# Altium PCB Float_Main_PCB.PcbDoc
Units mm, origin at the board's own origin, x right, y up, seen from the top; angles counter-clockwise.
Board outline 83 x 59 mm, 2 copper layers (Top Layer, Bottom Layer); 48 components, 37 nets, 201 pads, 46 vias.
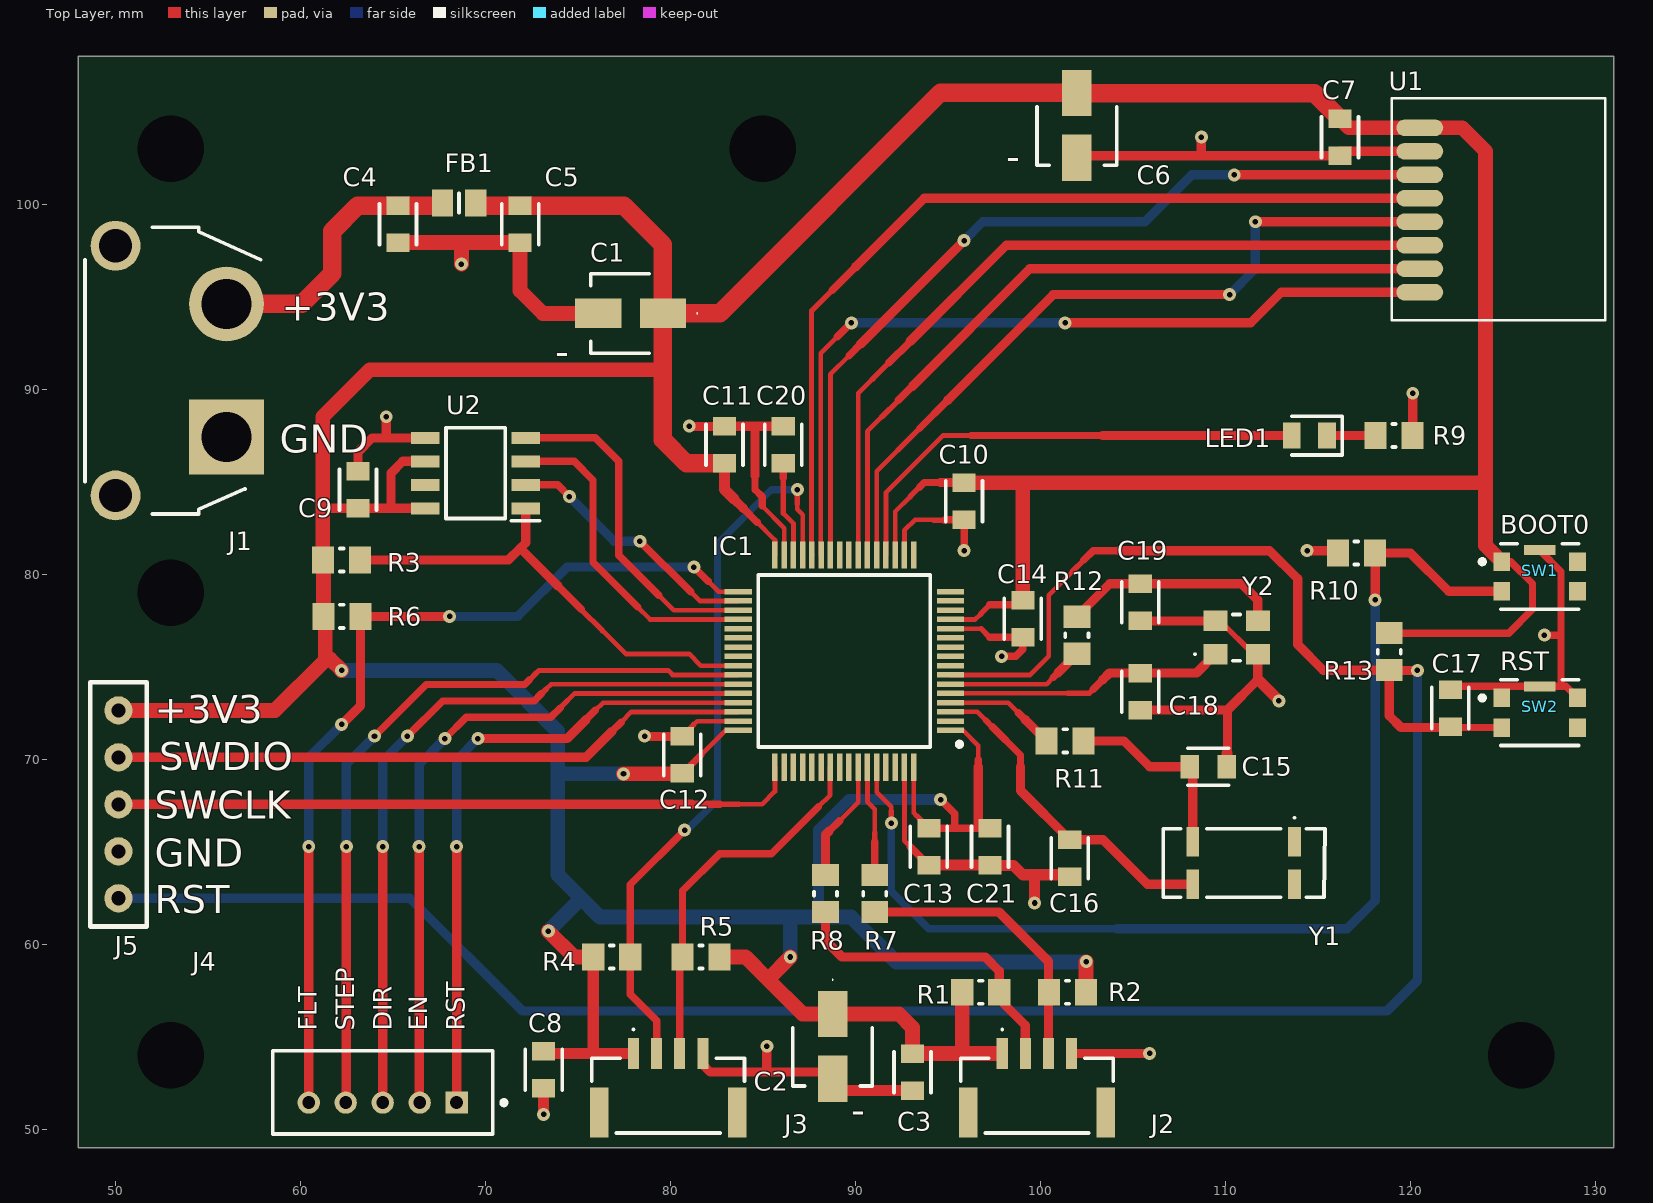
[diagram p0: Top Layer view]
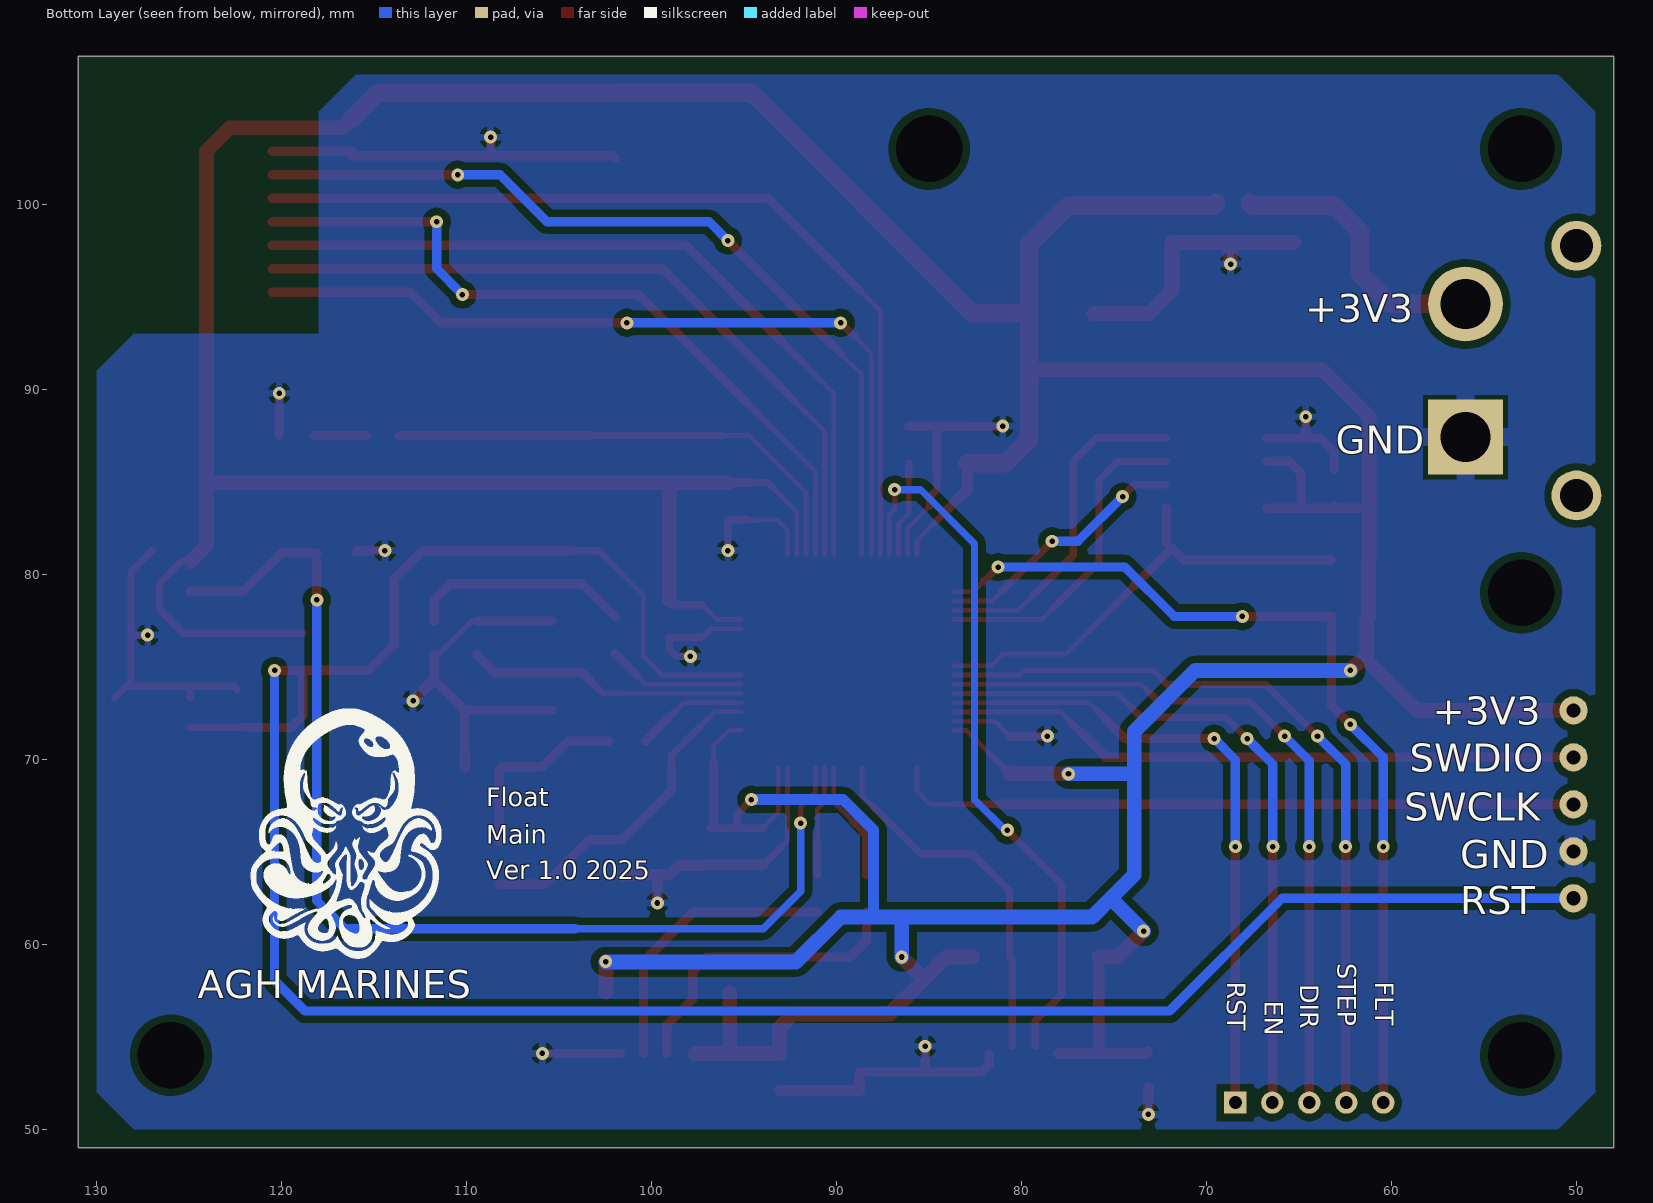
[diagram p1: Bottom Layer view, seen from below]
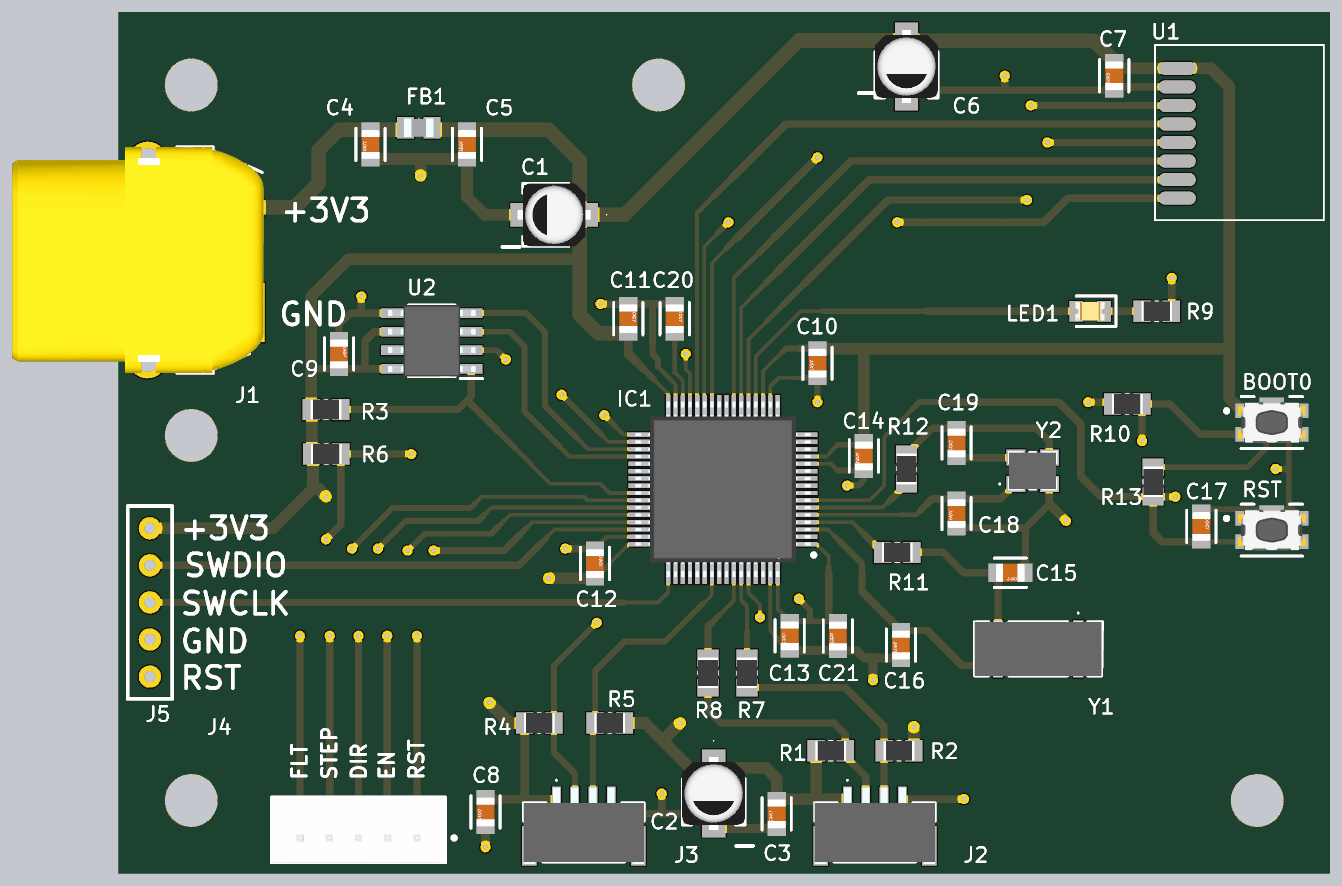
[diagram p2: 3D render of the assembled board from above, using the file's embedded part models]

## Layer stack, top to bottom
Top Solder: solder mask 0.0102, Solder Resist, Dk 3.5
Top Layer: signal copper 0.0356
Dielectric 1: dielectric 0.32, FR-4, Dk 4.8
Bottom Layer: signal copper 0.0356
Bottom Solder: solder mask 0.0102, Solder Resist, Dk 3.5

## Board outline
48,49 48,108 131,108 131,49

## Design rules (kind name [scope] priority, off if disabled: settings)
Clearance Clearance_3 [All] p1: gap=0.4 ignorepadtopadclearanceinfootprint=TRUE except(0.203: Arc-Arc Arc-Track Arc-SMDPad Arc-THPad Arc-Via Arc-Text Arc-Hole Track-Track Track-SMDPad Track-THPad Track-Via Track-Text Track-Hole SMDPad-SMDPad SMDPad-THPad SMDPad-Via SMDPad-Text SMDPad-Hole THPad-THPad THPad-Via THPad-Text THPad-Hole Via-Via Via-Text Via-Hole Text-Text Text-Hole)
DiffPairsRouting [All] p1: maxlimit=0.254 minlimit=0.127 mostfreqgap=0.203 toplayer_minwidth=0.229 toplayer_maxwidth=0.381 toplayer_prefwidth=0.254 bottomlayer_minwidth=0.229 bottomlayer_maxwidth=0.381 bottomlayer_prefwidth=0.254 maxuncoupledlength=12.7
HoleSize [All] p1: absolutevalues=TRUE maxlimit=5 minlimit=0.025 maxpercent=80.000 minpercent=20.000
MinimumSolderMaskSliver [All] p1: minsoldermaskwidth=0.01
PolygonConnect PolygonConnect_6 [All vs IsNamedPolygon('GND_L02_P000')] p1: thpad.connectstyle=Relief thpad.reliefconductorwidth=1 thpad.reliefentries=4 thpad.polygonreliefangle="90 Angle" thpad.airgapwidth=0.254 smdpad.connectstyle=Relief smdpad.reliefconductorwidth=0.3 smdpad.reliefentries=4 smdpad.polygonreliefangle="90 Angle" smdpad.airgapwidth=0.254 via.connectstyle=Relief via.reliefconductorwidth=0.4 via.reliefentries=4 via.polygonreliefangle="90 Angle" via.airgapwidth=0.254
RoutingVias [All] p1: holewidth=0.3 width=0.7 viastyle="Through Hole" minholewidth=0.25 minwidth=0.55 maxholewidth=0.4 maxwidth=0.9
SilkToSilkClearance [All] p1: silktosilkclearance=0.1
SilkToSolderMaskClearance [IsPad] p1: minsilkscreentomaskgap=0.1 clearancetoexposedcopper=TRUE
SolderMaskExpansion [All] p1: expansion=0.102 istentingtop=FALSE
SupplyNets "Schematic Supply Nets_1" [InNet('GND')] p1: voltage=0.000
SupplyNets "Schematic Supply Nets" [InNet('+3V3')] p2: voltage=0.000
UnRoutedNet [All] p1: checkbadconnections=TRUE
Width [All] p1: maxlimit=2 minlimit=0.2 preferedwidth=0.279 minimp=50.000000 maximp=50.000000 favimp=50.000000
24 further rules are at their usual default settings.

## Components (designator, comment, footprint, x,y, rotation, side; value= is the part's Value field where it differs from the comment)
C1 "22uF" EEE1AA220WR 77.851,94.107 r180 top
C2 "22uF" EEE1AA220WR 88.773,54.483 r270 top
C3 "100nF" FP-0805-L_2_01_0_2-W_1_25-MFG 93.091,53.086 r270 top
C4 "2.2uF" FP-0805-L_2_01_0_2-W_1_25-MFG 65.278,98.933 r270 top
C5 "2.2uF" FP-0805-L_2_01_0_2-W_1_25-MFG 71.882,98.933 r270 top
C6 "22uF" EEE1AA220WR 101.981,104.267 r270 top
C7 "100nF" FP-0805-L_2_01_0_2-W_1_25-MFG 116.205,103.632 r270 top
C8 "100nF" FP-0805-L_2_01_0_2-W_1_25-MFG 73.152,53.213 r270 top
C9 "100nF" FP-0805-L_2_01_0_2-W_1_25-MFG 63.119,84.582 r90 top
C10 "100nF" FP-0805-L_2_01_0_2-W_1_25-MFG 95.885,83.947 r270 top
C11 "2.2uF" FP-0805-L_2_01_0_2-W_1_25-MFG 82.931,86.995 r90 top
C12 "100nF" FP-0805-L_2_01_0_2-W_1_25-MFG 80.645,70.231 r90 top
C13 "100nF" FP-0805-L_2_01_0_2-W_1_25-MFG 93.98,65.278 r270 top
C14 "100nF" FP-0805-L_2_01_0_2-W_1_25-MFG 99.06,77.597 r270 top
C15 "15pF" FP-0805-L_2_01_0_2-W_1_25-MFG 109.093,69.596 r0 top
C16 "15pF" FP-0805-L_2_01_0_2-W_1_25-MFG 101.6,64.643 r270 top
C17 "100nF" FP-0805-L_2_01_0_2-W_1_25-MFG 122.174,72.771 r90 top
C18 "8pF" FP-0805-L_2_01_0_2-W_1_25-MFG 105.41,73.66 r270 top
C19 "8pF" FP-0805-L_2_01_0_2-W_1_25-MFG 105.41,78.486 r270 top
C20 "2.2uF" FP-0805-L_2_01_0_2-W_1_25-MFG 86.106,86.995 r90 top
C21 "100nF" FP-0805-L_2_01_0_2-W_1_25-MFG 97.282,65.262 r270 top
FB1 "BLM21PG221SN1D" BEADC2012X105N 68.58,100.076 r0 top
IC1 "STM32F401RET6" QFP50P1200X1200X160-64N 89.408,75.311 r180 top
J1 "XT60PW-F" XT60PWF 56.007,87.415 r90 top
J2 "I2C1 / BAR30" SM04BGHSTBLFSN 99.822,51.943 r0 top
J3 "I2C2" SM04BGHSTBLFSN 79.883,51.943 r0 top
J4 "B5B-PH-K-S(LF)(SN)" FP-B5B-PH-K-S_LF_SN-MFG 64.453,51.985 r180 top
J5 "ST-LINK" goldpin5 50.165,67.564 r270 top
LED1 "GREEN LED" LEDC2012X80N 114.554,87.503 r180 top
R1 "4k7" RESC2013X60X35ML10T20 96.79,57.404 r180 top
R2 "4k7" RESC2013X60X35ML10T20 101.473,57.404 r180 top
R3 "10k" RESC2013X60X35ML10T20 62.23,80.772 r0 top
R4 "4k7" RESC2013X60X35ML10T20 76.835,59.309 r180 top
R5 "4k7" RESC2013X60X35ML10T20 81.661,59.309 r180 top
R6 "10k" RESC2013X60X35ML10T20 62.246,77.724 r0 top
R7 "22R" RESC2013X60X35ML10T20 91.059,62.738 r90 top
R8 "22R" RESC2013X60X35ML10T20 88.392,62.738 r90 top
R9 "270R" RESC2013X60X35ML10T20 119.126,87.503 r180 top
R10 "10k" RESC2013X60X35ML10T20 117.094,81.153 r180 top
R11 "0R" RESC2013X60X35ML10T20 101.346,70.993 r180 top
R12 "0R" RESC2013X60X35ML10T20 101.981,76.708 r90 top
R13 "10k" RESC2013X60X35ML10T20 118.872,75.819 r90 top
SW1 "KMR221GLFS" FP-KMR221GLFS-MFG 127,79.883 r0 top
SW2 "KMR221GLFS" FP-KMR221GLFS-MFG 127,72.517 r0 top
U1 "NRF24L01+ SMD" PCBComponent_1 120.777,104.978 r270 top
U2 "M93C66" SOIC127P600X175-8N 69.469,85.471 r180 top
Y1 "LFXTAL003000REEL" LFXTAL003000REEL 110.998,64.389 r180 top
Y2 "3225-25M-SR" 322525MSR 110.617,76.581 r0 top

## Footprints (in the part's own frame and the unit in brackets; to place one, negate y for a bottom-side part, rotate by r counter-clockwise, add the part's x,y. Pads: shape width x height; smd on the part's side, far side on the other; paste and mask are expansions set on the pad)
322525MSR [mm]
  rect 1.3x1.1 smd: 1(-1.15,-0.9) 2(1.15,-0.9) 3(1.15,0.9) 4(-1.15,0.9)
  silkscreen extent -2.3,-1.25 0.2,1.25, body extent -1.69,-1.34 1.69,1.34, height 0.8
BEADC2012X105N [mm]
  rect 1.15x1.45 smd: 1(-0.9,0) 2(0.9,0)
  silkscreen extent 0,-0.53 0,0.53, body extent -1,-0.63 1,0.63, height 1.05
EEE1AA220WR [mm]
  rect 2.5x1.6 smd: 1(-1.75,0) 2(1.75,0)
  silkscreen extent -3.63,-2.15 2.15,2.15, body extent -2.5,-2.15 2.5,2.15, height 5.78
FP-0805-L_2_01_0_2-W_1_25-MFG [mm]
  rect 1x1.25 smd paste+0 mask+0: 1(-1,0) 2(1,0)
  silkscreen extent -1.1,-1 1.1,1, body extent -1.6,-0.82 1.6,0.82, height 0.25
FP-B5B-PH-K-S_LF_SN-MFG [mm]
  rect 1.2x1.2 hole 0.7 paste-2539.97 mask+0: 1(-4,0.55)
  round 1.2 hole 0.7 paste-2539.97 mask+0: 2(-2,0.55) 3(0,0.55) 4(2,0.55) 5(4,0.55)
  silkscreen extent -6.68,-2.25 5.95,2.25, body extent -6.05,-2.35 6.05,2.35, height 0.25
FP-KMR221GLFS-MFG [mm]
  rect 0.9x1 smd paste+0 mask+0: 1(-2.05,0.8) 2(2.05,0.8) 3(-2.05,-0.8) 4(2.05,-0.8)
  rect 1.7x0.55 smd paste+0 mask+0: 5(0,1.425)
  silkscreen extent -3.22,-1.78 2.1,1.78, body extent -2.6,-1.5 2.6,1.8, height 0.25
goldpin5 [mil]
  round 60 hole 30: 1(-200,0) 2(-100,0) 3(0,0) 4(100,0) 5(200,0)
  silkscreen extent -260,-60 260,60
LEDC2012X80N [mm]
  rect 0.95x1.4 smd: 1(-0.95,0) 2(0.95,0)
  silkscreen extent -1.78,-1.05 0.95,1.05, body extent -1,-0.63 1,0.63, height 0.8
LFXTAL003000REEL [mm]
  rect 0.7x1.6 smd: 1(-2.75,-1.15) 2(2.75,-1.15) 3(2.75,1.15) 4(-2.75,1.15)
  silkscreen extent -4.4,-2.5 4.35,1.85, body extent -4.35,-1.88 4.35,1.88, height 2.6
PCBComponent_1 [mm]
  oval 0.9x2.54 smd: 1(0.838,-0.254) 2(2.108,-0.254) 3(3.378,-0.254) 4(4.648,-0.254) 5(5.918,-0.254) 6(7.188,-0.254) 7(8.458,-0.254) 8(9.728,-0.254)
  silkscreen extent -0.76,-1.78 11.24,9.78
QFP50P1200X1200X160-64N [mm]
  rect 1.475x0.3 smd: 1(-5.738,3.75) 2(-5.738,3.25) 3(-5.738,2.75) 4(-5.738,2.25) 5(-5.738,1.75) 6(-5.738,1.25) 7(-5.738,0.75) 8(-5.738,0.25) 9(-5.738,-0.25) 10(-5.738,-0.75) 11(-5.738,-1.25) 12(-5.738,-1.75) 13(-5.738,-2.25) 14(-5.738,-2.75) 15(-5.738,-3.25) 16(-5.738,-3.75) 33(5.738,-3.75) 34(5.738,-3.25) 35(5.738,-2.75) 36(5.738,-2.25) 37(5.738,-1.75) 38(5.738,-1.25) 39(5.738,-0.75) 40(5.738,-0.25) 41(5.738,0.25) 42(5.738,0.75) 43(5.738,1.25) 44(5.738,1.75) 45(5.738,2.25) 46(5.738,2.75) 47(5.738,3.25) 48(5.738,3.75)
  rect 0.3x1.475 smd: 17(-3.75,-5.738) 18(-3.25,-5.738) 19(-2.75,-5.738) 20(-2.25,-5.738) 21(-1.75,-5.738) 22(-1.25,-5.738) 23(-0.75,-5.738) 24(-0.25,-5.738) 25(0.25,-5.738) 26(0.75,-5.738) 27(1.25,-5.738) 28(1.75,-5.738) 29(2.25,-5.738) 30(2.75,-5.738) 31(3.25,-5.738) 32(3.75,-5.738) 49(3.75,5.738) 50(3.25,5.738) 51(2.75,5.738) 52(2.25,5.738) 53(1.75,5.738) 54(1.25,5.738) 55(0.75,5.738) 56(0.25,5.738) 57(-0.25,5.738) 58(-0.75,5.738) 59(-1.25,5.738) 60(-1.75,5.738) 61(-2.25,5.738) 62(-2.75,5.738) 63(-3.25,5.738) 64(-3.75,5.738)
  silkscreen extent -6.35,-4.65 4.65,4.65, body extent -6,-6 6,6, height 1.6
RESC2013X60X35ML10T20 [mm] "Chip Resistor, 2-Leads, Body 2.1x1.35mm, IPC Low Density"
  rect 1.2x1.45 smd: 1(-1,0) 2(1,0)
  silkscreen extent -0.1,-0.63 0.1,0.63, body extent -1.05,-0.68 1.05,0.67, height 0.6
SM04BGHSTBLFSN [mm]
  rect 0.6x1.7 smd: 1(-1.875,2.15) 2(-0.625,2.15) 3(0.625,2.15) 4(1.875,2.15)
  rect 1x2.7 smd: 5(-3.725,-1.05) 6(3.725,-1.05)
  silkscreen extent -4.13,-2.15 4.13,3.5, body extent -4.13,-2.3 4.13,2.94, height 4.45
SOIC127P600X175-8N [mm]
  rect 1.525x0.65 smd: 1(-2.712,1.905) 2(-2.712,0.635) 3(-2.712,-0.635) 4(-2.712,-1.905) 5(2.712,-1.905) 6(2.712,-0.635) 7(2.712,0.635) 8(2.712,1.905)
  silkscreen extent -3.47,-2.45 1.6,2.58, body extent -3,-2.45 3,2.45, height 1.75
XT60PWF [mm]
  rect 4.05x4.05 hole 2.7: 1(0,0)
  round 4.05 hole 2.7: 2(7.2,0)
  round 2.7 hole 1.8: 3(-3.15,6) 4(10.35,6)
  silkscreen extent -4.15,-1.85 11.35,7.65, body extent -4.15,-1.94 11.35,15.26, height 8.37

## Part data
C1 C2 C6: library part EEE1CA100SR, "Capacitor Polarised", Manufacturer_Name=Panasonic, Arrow Part Number=EEE1CA100SR, Arrow Price/Stock=https://www.arrow.com/en/products/eee-1ca100sr/panasonic, Datasheet Link=http://industrial.panasonic.com/cdbs/www-data/pdf/RDE0000/ABA0000C1145.pdf, Height=5.5mm, Manufacturer_Part_Number=EEE1CA100SR
C3 C7 C8 C9 C10 C12 C13 C14 C15 C16 C17 C18 C19 C20 C21: library part CMP-1036-04738-3, Capacitance=100n, Case Code (Imperial)=0805, Case Code (Metric)=2012, Dielectric=X7R, Insulation Resistance=100GR, Max Operating Temperature=125°C, Min Operating Temperature=-55°C, Package Quantity=1, Tolerance=10%, Voltage=10V, Case/Package=0805, Construction=Flat, Contact Plating=Tin, Depth=1.25mm, Dissipation Factor=5%, Height=1.4mm, Lead Free="Lead Free", Length=2.01mm, Mount="Surface Mount", Number of Pins=2, Packaging="Tape and Reel", Radiation Hardening=No, REACH SVHC="No SVHC", RoHS Compliant=Yes, Series=-, Size=1.4mm, Termination=SMD/SMT, Thickness=0.055inch, Voltage Rating=10V, Voltage Rating (DC)=10V, Width=1.25mm
C4 C5 C11: library part CMP-1036-04738-3, Capacitance=2.2u, Case Code (Imperial)=0805, Case Code (Metric)=2012, Dielectric=X7R, Insulation Resistance=100GR, Max Operating Temperature=125°C, Min Operating Temperature=-55°C, Package Quantity=1, Tolerance=10%, Voltage=10V, Case/Package=0805, Construction=Flat, Contact Plating=Tin, Depth=1.25mm, Dissipation Factor=5%, Height=1.4mm, Lead Free="Lead Free", Length=2.01mm, Mount="Surface Mount", Number of Pins=2, Packaging="Tape and Reel", Radiation Hardening=No, REACH SVHC="No SVHC", RoHS Compliant=Yes, Series=-, Size=1.4mm, Termination=SMD/SMT, Thickness=0.055inch, Voltage Rating=10V, Voltage Rating (DC)=10V, Width=1.25mm
FB1: "Ferrite Bead", Manufacturer_Name="Murata Electronics", Mouser Part Number=81-BLM21P221SG, Arrow Part Number=BLM21PG221SN1D, Arrow Price/Stock=https://www.arrow.com/en/products/blm21pg221sn1d/murata-manufacturing?utm_currency=USD&region=europe, Datasheet Link=https://datasheet.datasheetarchive.com/originals/dk/DKDS-31/605570.pdf, Height=1.05mm, Manufacturer_Part_Number=BLM21PG221SN1D, Mouser Price/Stock=https://www.mouser.co.uk/ProductDetail/Murata-Electronics/BLM21PG221SN1D?qs=N%2FLoXOA9PTJ4i6RHFrsqmw%3D%3D
IC1: "Integrated Circuit", Manufacturer_Name=STMicroelectronics, Mouser Part Number=511-STM32F401RET6, Arrow Part Number=STM32F401RET6, Arrow Price/Stock=https://www.arrow.com/en/products/stm32f401ret6/stmicroelectronics?utm_currency=USD&region=nac, Datasheet Link=http://www.st.com/st-web-ui/static/active/en/resource/technical/document/datasheet/DM00102166.pdf, Height=1.6mm, Manufacturer_Part_Number=STM32F401RET6, Mouser Price/Stock=https://www.mouser.co.uk/ProductDetail/STMicroelectronics/STM32F401RET6?qs=s5SkPsIz108eLldhTu8INg%3D%3D
J1: "Connector", Manufacturer_Name=Amass, Datasheet Link=https://www.tme.eu/Document/1191bc2fa3aee3c446e5a895fd8f7983/XT60PW-F.pdf, Height=8.4mm, Manufacturer_Part_Number=XT60PW-F
J2 J3: library part SM04B-GHS-TB__LF__SN_, "Connector", Arrow Part Number="SM04B-GHS-TB (LF)(SN)", Manufacturer_Name="JST (JAPAN SOLDERLESS TERMINALS)", Arrow Price/Stock=https://www.arrow.com/en/products/sm04b-ghs-tb-lf-sn-/jst-manufacturing?utm_currency=USD&region=europe, Datasheet Link=https://www.jst-mfg.com/product/pdf/eng/eGH.pdf?688ae3895614e, Height=4.35mm, Manufacturer_Part_Number="SM04B-GHS-TB (LF)(SN)"
J4: library part CMP-2000-05908-2, "CONN HEADER VERT 5POS 2MM", Color=Natural, Contact Resistance=20mR, Current Rating=2A, Flammability Rating="UL94 V-0", Housing Color=White, Insulation Resistance=1MR, Max Operating Temperature=85°C, Max Voltage Rating (AC)=100V, Min Operating Temperature=-25°C, Connector Type=Header, Contact Finish - Mating=TIN, Contact Material=Brass, Contact Mating Length=0.13inch, Contact Plating=Tin, Contact Shape=Square, Contact Type="Male Pin", Depth=4.5mm, Fastening Type=Detent, Gender=Male, Height=9.4mm, Housing Material=Polyamide, Insulation Color=Natural, Insulation Material=Nylon, Lead Free="Lead Free", Lead Pitch=2mm, Length=11.9mm, Mated Stacking Heights=8mm, Material=Polyamide, Max Current Rating=2A, Mount="Through Hole", Number of Contacts=5, Number of Pins=5, Number of Poles=5, Number of Positions=5, Number of Rows=1, Orientation=Straight, Packaging=Bulk, Pitch=2mm, REACH SVHC="No SVHC", Series=PH, Termination=Solder, Voltage Rating=100V, Voltage Rating (AC)=100V, Width=4.5mm, Working Voltage=100V
J5: library part CMP-008-000005-1, Design Item ID=goldpin_5, Source=goldpin.SchLib
LED1: library part HSMG-C170, "LED", Manufacturer_Name="Avago Technologies", Mouser Part Number=630-HSMG-C170, Datasheet Link=https://datasheet.datasheetarchive.com/originals/distributors/SFDatasheet-4/sf-00083853.pdf, Height=0.8mm, Manufacturer_Part_Number=HSMG-C170, Mouser Price/Stock=https://www.mouser.co.uk/ProductDetail/Broadcom-Avago/HSMG-C170?qs=YDL0qNrpDT4lm8ArMPkMEA%3D%3D
R1 R2 R3 R4 R5 R6 R7 R8 R9 R10 R11 R12 R13: library part CMP-2100-03671-1, Case Code (Imperial)=0805, Case Code (Metric)=2012, Manufacturer=Yageo, Max Operating Temperature=155degC, Max Power Dissipation=125mW, Min Operating Temperature=-55degC, Package Description="2-Pin Surface Mounted Device, Body 2 x 1.25 mm", Package Quantity=1, Resistance=1KOhm, Temperature Coefficient=100ppm/degreesC, Tolerance=1%, Voltage Rating=150V, Case/Package=0805, Composition=ThickFilm, Datasheet URL=http://www.yageo.com/NewPortal/yageodocoutput?fileName=/pdf/R-Chip/PYu-RC_Group_51_RoHS_L_5.pdf, Datasheet Version="Rev. 5, 10/2016", Depth=1.25mm, Height=0.024inch, Lead Free=LeadFree, Length=0.079inch, Manufacturer URL=http://www.yageo.com/, Military Standard=Not, Number of Pins=2, Number of Terminations=2, Package Reference=0805, Packaging=TapeandReel, Power Rating=125mW, REACH SVHC=Unknown, RoHSCompliant=true, Termination=SMD/SMT, Voltage Rating (DC)=150V, Width=0.049inch
SW1 SW2: library part CMP-10040-000018-1, "SWITCH TACTILE SPST-NO 0.05A 32V", Case/Package=SMD/SMT, Contact Current Rating=50mA, Contact Resistance=100mR, Max Operating Temperature=85°C, Max Voltage Rating (DC)=32V, Min Operating Temperature=-40°C, Operating Force=2N, Package Quantity=1, Power Rating=1W, Actuator Length=0.5mm, Actuator Type=Standard, Contact Material=Silver, Contact Plating=Silver, Current Rating=50mA, Depth=4.6mm, Illumination Type=Non-Illuminated, Lead Free="Lead Free", Length=2.8mm, Max Current Rating=50mA, Mechanical Life=200000Cycles, Mount="Surface Mount", Orientation=Straight, Packaging="Tape and Reel", Radiation Hardening=No, REACH SVHC="No SVHC", Switch Function=Off-Mom, Switch Travel=0.25mm, Termination="Gull Wing", Throw Configuration=SPST, Voltage Rating (DC)=32V, Width=2.8mm
U2: library part M93C66-WMN6TP, "Integrated Circuit", Manufacturer_Name=STMicroelectronics, Mouser Part Number=511-M93C66-WMN6TP, Arrow Part Number=M93C66-WMN6TP, Arrow Price/Stock=https://www.arrow.com/en/products/m93c66-wmn6tp/stmicroelectronics, Datasheet Link=http://www.st.com/st-web-ui/static/active/en/resource/technical/document/datasheet/CD00001142.pdf, Height=1.75mm, Manufacturer_Part_Number=M93C66-WMN6TP, Mouser Price/Stock=https://www.mouser.co.uk/ProductDetail/STMicroelectronics/M93C66-WMN6TP?qs=OMlU9E68qqQmdZ2%252BtP%2FZLw%3D%3D
Y1: "Crystal or Oscillator", Manufacturer_Name=IQD, Mouser Part Number=449-LFXTAL003000REEL, Arrow Part Number=LFXTAL003000REEL, Arrow Price/Stock=https://www.arrow.com/en/products/lfxtal003000reel/iqd-frequency-products?region=europe, Datasheet Link=https://www.iqdfrequencyproducts.com/products/pn/LFXTAL003000.pdf, Height=2.5mm, Manufacturer_Part_Number=LFXTAL003000REEL, Mouser Price/Stock=https://www.mouser.co.uk/ProductDetail/IQD/LFXTAL003000Reel?qs=GJ%2F2ZGcr5uOHwN9t8Hha8Q%3D%3D
Y2: "Crystal or Oscillator", Manufacturer_Name=SRPASSIVES, Datasheet Link=https://www.tme.eu/Document/9cb2d0edad968d8543e7bc99995fd180/3235.pdf, Height=0.7mm, Manufacturer_Part_Number=3225-25M-SR

## Free pads (board coordinates)
  round 1.524 hole 3.6: ""(53,54) ""(53,79) ""(53,103) ""(85,103)
  round 1.524 hole 3.6 mask+0: ""(126,54)

## Via types
v1: diameter 0.7, hole 0.3, Top Layer to Bottom Layer, 46 vias

## Nets (pads, with @x,y where several pads share a name; then routed paths per layer and width w, separated by ;. In a path a pad name is that pad's centre, name@x,y a point inside that pad or via, vN(x,y) a via of type N, cw(c..) or ccw(c..) an arc to the next point about the centre after c; other vN are vias at no path point)
+3V3: C1.1 C2.1 C3.1 C5.1 C6.1 C7.1 C8.1 C9.1 C10.1 C11.1 C12.1 C13.1 C14.1 C21.1 FB1.2 IC1.1 IC1.13 IC1.19 IC1.32 IC1.48 IC1.64 J2.1 J3.1 J5.1 R1.2 R2.1 R3.1 R4.2 R5.1 R6.1 R13.2 SW1.1 U1.1 U2.6 U2.8 | length 350.1
  Top Layer w0.254: 84.709,82.804 85.658,81.855 IC1.32 ; IC1.19 92.158,83.395 92.964,84.201 ; IC1.64 93.158,67.1 93.329,66.929 93.345,66.929 ; IC1.1 95.825,71.561 96.647,70.739 96.647,69.977
  Top Layer w0.256: 81.661,70.231 82.991,71.561 IC1.48 ; IC1.13 96.484,77.561 96.774,77.851
  Top Layer w0.3: 92.964,84.201 93.472,84.709 ; 93.345,66.929 93.98,66.294 C13.1 ; 96.774,77.851 97.282,78.359
  Top Layer w0.4: C12.1@80.391,69.485 C12.1 ; C12.1@80.698,69.479 80.904,69.474 81.661,70.231 ; 83.947,83.566 84.709,82.804 ; 93.472,84.709 93.726,84.963 94.615,84.963 ; C13.1 95.377,66.278 ; v1(94.615,67.818) 95.377,67.056 95.377,66.278 ; 96.647,69.596 96.647,69.977 ; C21.1@96.79,66.278 95.377,66.278 ; 97.282,78.359 98.949,78.359 C14.1@99.123,78.533 ; R13.2 125.333,76.819 126.619,78.105 126.619,79.502 125.438,80.683 SW1.1
  Top Layer w0.5: 61.087,83.439 61.214,83.566 62.992,83.566 C9.1@63.119,83.693 ; C9.1@63.119,83.566 64.897,83.566 ; U2.8 64.897,83.566 ; U2.6 65.532,86.106 64.897,85.471 64.897,83.566 ; C8.1 C8.1@73.272,54.093 ; C12.1@80.629,69.215 C12.1 ; 83.439,84.074 83.947,83.566 ; 94.615,84.963 95.869,84.963 C10.1 ; 96.647,69.596 96.647,66.421 C21.1@96.79,66.278
  Top Layer w0.6: C8.1@73.272,54.093 75.835,54.093 ; R4.2 75.835,54.093 ; J3.1 75.835,54.093 ; C11.1 82.931,84.582 83.439,84.074
  Top Layer w0.8: J5.1 58.628,72.644 61.342,75.358 ; R3.1@61.214,80.788 61.214,83.566 61.214,88.519 63.754,91.059 79.601,91.059 ; R3.1@61.246,80.756 R6.1 61.342,77.628 61.342,75.438 61.595,75.438 v1(62.23,74.803) ; v1(73.406,60.706) 74.803,59.309 R4.2 ; v1(77.47,69.215) C12.1@80.629,69.215 ; C12.1@80.153,69.231 C12.1 ; R5.1 84.074,59.309 85.217,58.166 ; v1(86.487,59.309) 85.344,58.166 85.217,58.166 ; R1.2 95.79,54.118 95.758,54.086 ; C10.1 99.06,84.947 ; J2.1@97.663,54.093 97.409,54.093 97.402,54.086 95.758,54.086 ; C14.1 99.06,84.947 ; R2.1 102.473,59.039 v1(102.489,59.055) ; C7.1 116.697,104.14 U1.1 122.809,104.14 124.079,102.87 124.079,84.947 ; SW1.1 124.079,81.554 124.079,84.947 ; 85.217,58.166 87.15,56.233 C2.1 92.357,56.233 93.091,55.499 C3.1 95.758,54.086 ; 99.06,84.947 124.079,84.947
  Top Layer w1: FB1.2 69.623,99.933 C5.1 77.486,99.933 79.601,97.818 C1.1 ; C11.1 80.883,85.995 79.601,87.277 79.601,91.059 C1.1 ; C7.1 114.82,106.017 C6.1 101.953,106.045 94.615,106.045 82.677,94.107 C1.1
  Bottom Layer w0.6: 88.011,61.468 88.011,66.167 89.662,67.818 v1(94.615,67.818)
  Bottom Layer w0.8: v1(62.23,74.803) 70.612,74.803 73.914,71.501 73.914,69.215 ; v1(73.406,60.706) 75.057,62.357 75.057,62.611 ; v1(77.47,69.215) 73.914,69.215 ; v1(86.487,59.309) 86.487,61.468 ; v1(102.489,59.055) 102.473,59.039 92.218,59.039 89.789,61.468 88.011,61.468 86.487,61.468 ; 73.914,69.215 73.914,63.754 75.057,62.611 ; 75.057,62.611 76.2,61.468 86.487,61.468
BOOT0: IC1.60 R10.1 SW1.3 | length 60.7
  Top Layer w0.256: IC1.60 91.158,68.227 91.948,67.437 91.948,67.183
  Top Layer w0.3: v1(91.948,66.548) 91.948,67.183
  Top Layer w0.5: R10.1 120.015,81.153 122.085,79.083 SW1.3 ; v1(118.11,78.613) R10.1@118.11,80.722
  Bottom Layer w0.4: v1(91.948,66.548) 91.948,62.865 93.98,60.833 104.14,60.833
  Bottom Layer w0.5: 104.14,60.833 116.586,60.833 118.11,62.357 v1(118.11,78.613)
Crystal32_OUT: C15.1 R11.1 Y1.2 | length 10.2
  Top Layer w0.5: R11.1 104.521,70.993 105.918,69.596 C15.1 ; Y1.2 C15.1@108.248,69.441
Crystal_OUT: C19.1 R12.2 Y2.3 | length 12
  Top Layer w0.5: R12.2 103.759,79.486 C19.1 110.887,79.486 111.767,78.606 Y2.3
EEPROM_CS: IC1.41 R3.2 U2.1 | length 25.6
  Top Layer w0.256: 76.327,76.962 77.597,75.692 81.026,75.692 81.657,75.061 IC1.41
  Top Layer w0.3: 75.184,78.105 76.327,76.962
  Top Layer w0.4: 73.914,79.375 75.184,78.105
  Top Layer w0.5: R3.2@63.246,80.772 71.247,80.772 71.882,81.407 ; U2.1 72.181,81.706 71.882,81.407 ; 73.914,79.375 71.882,81.407
EEPROM_MISO: IC1.35 U2.4 | length 18.3
  Top Layer w0.256: 79.375,78.867 80.181,78.061 IC1.35
  Top Layer w0.4: U2.4 75.946,87.376 77.216,86.106 77.216,81.026 79.375,78.867
EEPROM_MOSI: IC1.36 U2.3 | length 17.6
  Top Layer w0.256: 78.232,78.232 78.903,77.561 IC1.36
  Top Layer w0.4: U2.3 74.803,86.106 75.819,85.09 75.819,80.645 78.232,78.232
EEPROM_SCK: IC1.34 U2.2 | length 14.1
  Top Layer w0.256: 81.099,79.048 81.586,78.561 IC1.34
  Top Layer w0.4: U2.2 73.914,84.836 v1(74.549,84.201) ; v1(78.359,81.788) 81.099,79.048
  Bottom Layer w0.5: v1(74.549,84.201) 76.962,81.788 v1(78.359,81.788)
GND: C1.2 C2.2 C3.2 C4.2 C5.2 C6.2 C7.2 C8.2 C9.2 C10.2 C11.2 C12.2 C13.2 C14.2 C15.2 C16.2 C17.2 C18.2 C19.2 C20.2 C21.2 IC1.12 IC1.18 IC1.31 IC1.47 IC1.63 J1.1 J2.4 J3.4 J5.4 R9.1 R10.2 SW1.5 SW2.1 SW2.2 SW2.5 U1.2 U2.5 Y2.2 Y2.4 | length 147.5
  Top Layer w0.254: 84.963,83.693 86.158,82.498 IC1.31 ; IC1.18 92.658,82.371 93.234,82.947 94.218,82.947 94.234,82.931
  Top Layer w0.256: 81.28,71.882 81.455,72.057 81.455,72.061 IC1.47 ; IC1.63 92.658,65.6 92.98,65.278 ; IC1.12 96.802,77.061
  Top Layer w0.3: C12.2 80.645,71.247 81.28,71.882 ; 94.234,82.931 94.837,82.931 ; 96.802,77.061 97.266,76.597 ; Y2.4 109.717,77.481 111.517,75.681 Y2.2 ; R10.2@115.967,81.28 R10.2
  Top Layer w0.4: 84.582,85.344 84.582,84.582 84.963,84.201 84.963,83.693 ; 92.98,65.278 C13.2 ; 94.837,82.931 94.853,82.947 C10.2 v1(95.885,81.28) ; C21.2@97.266,64.278 C21.2 ; 97.266,76.597 C14.2 99.06,75.946 98.679,75.565 v1(97.917,75.565) ; C19.2 C19.2@105.415,77.481 ; C17.2@122.428,73.771 122.599,73.942 124.8,73.942 ; SW2.1 124.95,73.792 124.8,73.942 ; SW1.5 128.157,80.151 128.157,76.708 ; v1(127.254,76.708) 128.157,76.708 ; SW2.2 128.425,73.942 128.157,73.942 ; 124.8,73.942 SW2.5 128.157,73.942 ; 128.157,73.942 128.157,76.708
  Top Layer w0.5: C9.2@63.119,85.693 63.119,86.614 63.881,87.376 64.643,87.376 ; v1(64.643,88.519) 64.643,87.376 ; U2.5 64.643,87.376 ; v1@78.629,71.231 C12.2 ; v1(81.026,88.011) 81.042,87.995 C11.2 82.947,88.011 84.582,88.011 ; J3.4 81.758,53.497 82.169,53.086 85.217,53.086 ; 84.582,85.344 84.582,88.011 ; v1(85.217,54.483) 85.217,53.086 ; C20.2 86.09,88.011 84.582,88.011 ; C2.2 88.773,53.086 85.217,53.086 ; J2.4 105.909,54.093 v1(105.918,54.102) ; C6.2 102.096,102.632 108.712,102.632 ; C18.2 110.125,72.66 ; C19.2@105.415,77.481 Y2.4 ; v1(108.712,103.632) 108.712,102.632 ; 110.125,70.342 110.125,72.66 ; Y2.2 111.767,74.302 110.125,72.66 ; v1(114.427,81.28) R10.2@115.967,81.28 ; R9.1@120.142,87.519 v1(120.142,89.789) ; U1.2 116.205,102.87 C7.2 108.712,102.632
  Top Layer w0.6: v1(73.152,50.8) C8.2 ; C2.2 88.773,52.102 88.789,52.086 C3.2 ; C13.2 C21.2@97.266,64.278 ; C21.2 98.552,64.262 99.06,63.754 99.695,63.754 ; v1(99.695,62.23) 99.695,63.754 ; C16.2 101.489,63.754 99.695,63.754 ; C15.2 110.093,70.342 ; 111.767,74.302 112.903,73.166 v1(112.903,73.152)
  Top Layer w0.8: C4.2 68.707,97.933 ; v1(68.707,96.774) 68.707,97.933 ; C1.2 73.107,94.107 71.882,95.332 C5.2 68.707,97.933
  other v1: 78.613,71.247
I2C1_SCL: IC1.58 R8.2 | length 6.6
  Top Layer w0.256: 89.154,66.675 90.158,67.679 IC1.58
  Top Layer w0.4: 88.582,66.103 89.154,66.675
  Top Layer w0.5: R8.2 88.392,65.913 88.582,66.103
I2C1_SDA: IC1.59 R7.2 | length 6
  Top Layer w0.256: IC1.59 90.658,67.711 91.059,67.31 91.059,66.04
  Top Layer w0.3: 91.059,65.532 91.059,66.04
  Top Layer w0.4: R7.2 91.059,65.532
I2C2_SCL: IC1.29 J3.2 R4.1 | length 39
  Top Layer w0.256: 86.868,83.82 86.868,83.511 87.158,83.221 IC1.29
  Top Layer w0.3: 86.868,83.82 v1(86.868,84.582)
  Top Layer w0.4: J3.2@79.258,54.474 79.258,55.87 77.835,57.293 R4.1 77.835,63.23 v1(80.772,66.167)
  Bottom Layer w0.4: v1(80.772,66.167) 80.899,66.167 82.55,67.818 82.55,81.661 85.471,84.582 v1(86.868,84.582)
I2C2_SDA: IC1.55 J3.3 R5.2 | length 20.1
  Top Layer w0.256: 88.011,67.437 88.639,68.065 88.639,69.554 IC1.55
  Top Layer w0.4: J3.3@80.508,54.474 80.508,59.156 R5.2 80.661,62.881 82.677,64.897 85.471,64.897 88.011,67.437
I2C_SCL: J2.2 R1.1 R8.1 | length 16.7
  Top Layer w0.5: R8.1 88.392,60.198 89.281,59.309 97.028,59.309 97.79,58.547 R1.1 97.79,57.023 99.197,55.616 J2.2
I2C_SDA: J2.3 R2.2 R7.1 | length 15.4
  Top Layer w0.5: R7.1 97.774,61.738 100.447,59.065 R2.2@100.447,57.43 ; J2.3 R2.2@100.447,57.378
LED: IC1.20 LED1.2 | length 26.7
  Top Layer w0.254: IC1.20 91.658,84.419 94.742,87.503 96.266,87.503
  Top Layer w0.4: 96.266,87.503 103.378,87.503
  Top Layer w0.5: 103.378,87.503 LED1.2 LED1.2@113.665,87.503
LED2_R: LED1.1 R9.2 | length 2.8
  Top Layer w0.5: LED1.1@115.443,87.503 LED1.1 R9.2 R9.2@118.253,87.503
NRF_CE: IC1.26 U1.3 | length 46.1
  Top Layer w0.254: IC1.26 88.658,90.817 89.662,91.821
  Top Layer w0.4: 89.662,91.821 90.297,92.456
  Top Layer w0.5: 90.297,92.456 v1(95.885,98.044) ; v1(110.49,101.6) U1.3
  Bottom Layer w0.5: v1(95.885,98.044) 96.901,99.06 105.664,99.06 108.204,101.6 v1(110.49,101.6)
NRF_CSN: IC1.28 U1.4 | length 48.6
  Top Layer w0.254: 87.638,94.242 87.638,81.923 87.638,81.069 IC1.28
  Top Layer w0.3: 87.638,94.242 88.751,95.355
  Top Layer w0.4: 88.751,95.355 90.021,96.625
  Top Layer w0.5: 90.021,96.625 93.726,100.33 U1.4
NRF_IRQ: IC1.27 U1.8 | length 44.7
  Top Layer w0.256: IC1.27 88.139,81.068 88.139,81.924 88.138,81.925 88.138,91.948 89.027,92.837
  Top Layer w0.4: 89.027,92.837 v1(89.789,93.599)
  Top Layer w0.5: v1(101.346,93.599) 111.379,93.599 113.03,95.25 U1.8
  Bottom Layer w0.5: v1(89.789,93.599) v1(101.346,93.599)
NRF_MISO: IC1.22 U1.7 | length 40.2
  Top Layer w0.254: IC1.22 90.658,87.737 91.44,88.519
  Top Layer w0.3: 91.44,88.519 92.329,89.408
  Top Layer w0.4: 92.329,89.408 93.091,90.17
  Top Layer w0.5: 93.091,90.17 99.441,96.52 U1.7
NRF_MOSI: IC1.23 U1.6 | length 42.4
  Top Layer w0.254: IC1.23 90.158,89.801 90.908,90.551 90.932,90.551
  Top Layer w0.3: 90.932,90.551 91.821,91.44
  Top Layer w0.4: 91.821,91.44 92.964,92.583
  Top Layer w0.5: 92.964,92.583 98.171,97.79 U1.6
NRF_SCK: IC1.21 U1.5 | length 41
  Top Layer w0.254: IC1.21 91.158,85.57 92.329,86.741
  Top Layer w0.3: 92.329,86.741 93.472,87.884
  Top Layer w0.4: 93.472,87.884 94.996,89.408
  Top Layer w0.5: 94.996,89.408 100.711,95.123 v1(110.236,95.123) ; v1(111.633,99.06) U1.5
  Bottom Layer w0.5: v1(110.236,95.123) 111.633,96.52 v1(111.633,99.06)
NRST: C17.1 IC1.7 J5.5 R13.1 SW2.3 | length 133.7
  Top Layer w0.256: IC1.7 99.453,74.561 100.457,75.565 100.457,78.867 101.727,80.137
  Top Layer w0.3: 101.727,80.137 102.362,80.772
  Top Layer w0.4: 102.362,80.772 102.87,81.28 104.267,81.28 ; C17.1@121.936,71.771 C17.1 ; C17.1@122.174,71.717 SW2.3
  Top Layer w0.5: 104.267,81.28 112.395,81.28 113.919,79.756 113.919,76.2 115.3,74.819 R13.1 118.872,72.352 119.507,71.717 C17.1@121.936,71.717 ; R13.1@118.888,74.803 v1(120.396,74.803)
  Bottom Layer w0.5: J5.5 65.913,62.484 72.009,56.388 118.745,56.388 120.396,58.039 v1(120.396,74.803)
OSC32_IN: C16.1 IC1.3 Y1.3 | length 18.1
  Top Layer w0.254: IC1.3 96.603,72.561 97.028,72.136
  Top Layer w0.3: 97.028,72.136 97.409,71.755
  Top Layer w0.4: 97.409,71.755 98.933,70.231 98.933,69.596
  Top Layer w0.5: 98.933,69.596 98.933,68.31 C16.1 103.394,65.643 105.798,63.239 Y1.3
OSC32_OUT: IC1.4 R11.2 | length 6.1
  Top Layer w0.254: IC1.4 98.262,73.061 98.806,72.517
  Top Layer w0.4: 98.806,72.517 99.187,72.136
  Top Layer w0.5: 99.187,72.136 100.33,70.993 R11.2
OSC_IN: C18.1 IC1.5 Y2.1 | length 15.2
  Top Layer w0.254: IC1.5 101.501,73.561
  Top Layer w0.3: 101.501,73.561 102.644,73.561 102.87,73.787
  Top Layer w0.4: 102.87,73.787 103.378,74.295
  Top Layer w0.5: 103.378,74.295 103.743,74.66 C18.1 108.446,74.66 Y2.1
OSC_OUT: IC1.6 R12.1 | length 7.5
  Top Layer w0.254: IC1.6 100.35,74.061 100.711,74.422
  Top Layer w0.4: 100.711,74.422 100.965,74.676
  Top Layer w0.5: 100.965,74.676 101.981,75.692 R12.1
STEPPER_DIR: IC1.43 J4.3 | length 39.4
  Top Layer w0.256: 73.279,73.787 73.553,74.061 IC1.43
  Top Layer w0.3: 73.025,73.533 73.279,73.787
  Top Layer w0.4: v1(65.786,71.247) 67.691,73.152 72.644,73.152 73.025,73.533
  Top Layer w0.5: J4.3 v1(64.453,65.278)
  Bottom Layer w0.5: v1@64.453,65.341 64.453,69.914 v1(65.786,71.247)
STEPPER_EN: IC1.44 J4.2 | length 36.9
  Top Layer w0.256: 74.422,73.152 74.831,73.561 IC1.44
  Top Layer w0.3: 74.041,72.771 74.422,73.152
  Top Layer w0.4: v1(66.421,65.278) v1@66.453,65.246 ; v1(67.818,71.12) 68.961,72.263 73.533,72.263 74.041,72.771
  Top Layer w0.5: J4.2@66.421,51.467 v1(66.421,65.278)
  Bottom Layer w0.5: v1@66.421,65.532 66.421,69.723 v1(67.818,71.12)
STEPPER_FLT: IC1.33 J4.5 R6.2 | length 49.5
  Top Layer w0.256: 82.042,79.629 82.61,79.061 IC1.33
  Top Layer w0.4: v1(81.28,80.391) 82.042,79.629
  Top Layer w0.5: J4.5 v1(60.452,65.278) ; v1(62.23,71.882) 63.246,72.898 R6.2 v1(68.072,77.724)
  Bottom Layer w0.5: v1(60.452,65.278) 60.452,70.104 v1(62.23,71.882) ; v1(68.072,77.724) 71.755,77.724 74.422,80.391 v1(81.28,80.391)
STEPPER_RST: IC1.45 J4.1 | length 34.9
  Top Layer w0.256: 75.946,72.644 76.363,73.061 IC1.45
  Top Layer w0.4: 75.565,72.263 75.946,72.644
  Top Layer w0.5: J4.1 v1(68.453,65.278) ; v1(69.596,71.12) 74.422,71.12 75.438,72.136
  Bottom Layer w0.5: v1(68.453,65.278) 68.453,69.977 v1(69.596,71.12)
STEPPER_STEP: IC1.42 J4.4 | length 41.7
  Top Layer w0.256: 72.771,74.676 72.898,74.803 79.883,74.803 80.125,74.561 IC1.42
  Top Layer w0.3: 72.39,74.295 72.771,74.676
  Top Layer w0.4: J4.4 J4.4@62.484,51.466 ; v1(64.008,71.247) 66.802,74.041 72.136,74.041 72.39,74.295
  Top Layer w0.5: J4.4@62.484,51.466 v1(62.484,65.278)
  Bottom Layer w0.5: v1(62.484,65.278) 62.484,69.723 v1(64.008,71.247)
SWCLK: IC1.49 J5.3 | length 37.1
  Top Layer w0.256: 83.693,67.564 84.963,67.564 85.658,68.259 IC1.49
  Top Layer w0.3: 82.677,67.564 83.693,67.564
  Top Layer w0.4: 81.153,67.564 82.677,67.564
  Top Layer w0.5: J5.3 81.153,67.564
SWDIO: IC1.46 J5.2 | length 34.5
  Top Layer w0.256: 77.343,72.009 77.895,72.561 IC1.46
  Top Layer w0.4: 76.835,71.501 77.343,72.009
  Top Layer w0.5: J5.2 75.438,70.104 76.835,71.501
VCAP1: C20.1 IC1.30 | length 5.2
  Top Layer w0.254: 86.106,83.312 86.658,82.76 IC1.30
  Top Layer w0.3: 86.106,83.312 86.106,85.217
  Top Layer w0.4: 86.106,85.217 C20.1
VIN: C4.1 FB1.1 J1.2 | length 15.3
  Top Layer w1: J1.2 60.071,94.615 61.722,96.266 61.722,98.552 63.103,99.933 C4.1 67.537,99.933 FB1.1
pads on no net: IC1.2 IC1.8 IC1.9 IC1.10 IC1.11 IC1.14 IC1.15 IC1.16 IC1.17 IC1.24 IC1.25 IC1.37 IC1.38 IC1.39 IC1.40 IC1.50 IC1.51 IC1.52 IC1.53 IC1.54 IC1.56 IC1.57 IC1.61 IC1.62 J1.3 J1.4 J2.5 J2.6 J3.5 J3.6 SW1.2 SW1.4 SW2.4 U2.7 Y1.1 Y1.4

## Polygon pours and split planes (outlines as drawn)
GND on Bottom Layer "GND_L02_P000" (solid, pour order 0): 49,105 51,107 116,107 118,105 118,93 128,93 130,91 130,52 128,50 51,50 49,52

## Silkscreen, mask and mechanical layers (free items; w line width, h text height)
Top Overlay:
  text "-" at 98.171,101.854 h1.52
  text "+3V3" at 59.002,93.699 h1.52
  text "-" at 73.787,91.313 h1.52
  text "GND" at 58.875,86.584 h1.52
  text "BOOT0" at 124.864,82.192 h1
  text "RST" at 124.864,74.826 h1
  text "+3V3" at 52.12,71.936 h1.52
  text "SWDIO" at 52.367,69.4 h1.52
  text "SWCLK" at 52.125,66.771 h1.52
  text "GND" at 52.12,64.186 h1.52
  text "RST" at 52.12,61.686 h1.52
  text "FLT" at 60.887,55.318 h1 r90
  text "STEP" at 62.919,55.318 h1 r90
  text "DIR" at 64.951,55.318 h1 r90
  text "EN" at 66.856,55.318 h1 r90
  text "RST" at 68.888,55.318 h1 r90
  text "-" at 89.789,50.292 h1.52
Bottom Overlay:
  region: 4491 vertices and 14 holes, not listed, extent 111.37,59.223 121.676,72.736
  text "+3V3" at 64.661,93.627 h1.52
  text "GND" at 63.034,86.512 h1.52
  text "+3V3" at 57.779,71.864 h1.52
  text "SWDIO" at 59.031,69.328 h1.52
  text "Float" at 108.943,67.46 h1
  text "SWCLK" at 59.318,66.672 h1.52
  text "Main" at 108.943,65.428 h1
  text "GND" at 56.279,64.114 h1.52
  text "Ver 1.0 2025" at 108.943,63.523 h1
  text "RST" at 56.279,61.614 h1.52
  text "STEP" at 62.919,58.982 h1 r90
  text "FLT" at 60.887,57.966 h1 r90
  text "RST" at 68.888,57.966 h1 r90
  text "DIR" at 64.951,57.839 h1 r90
  text "AGH MARINES" at 124.555,57.069 h1.52
  text "EN" at 66.856,56.95 h1 r90
Mechanical 1:
  the board outline again, w0.254